# Altium PCB PCB2.PcbDoc
Units mil, origin at the board's own origin, x right, y up, seen from the top; angles counter-clockwise.
Board outline 3900 x 6000 mil, 2 copper layers (Top Layer, Bottom Layer); 94 components, 52 nets, 309 pads, 0 vias.
Unrouted connection lines stored in the file: 197.
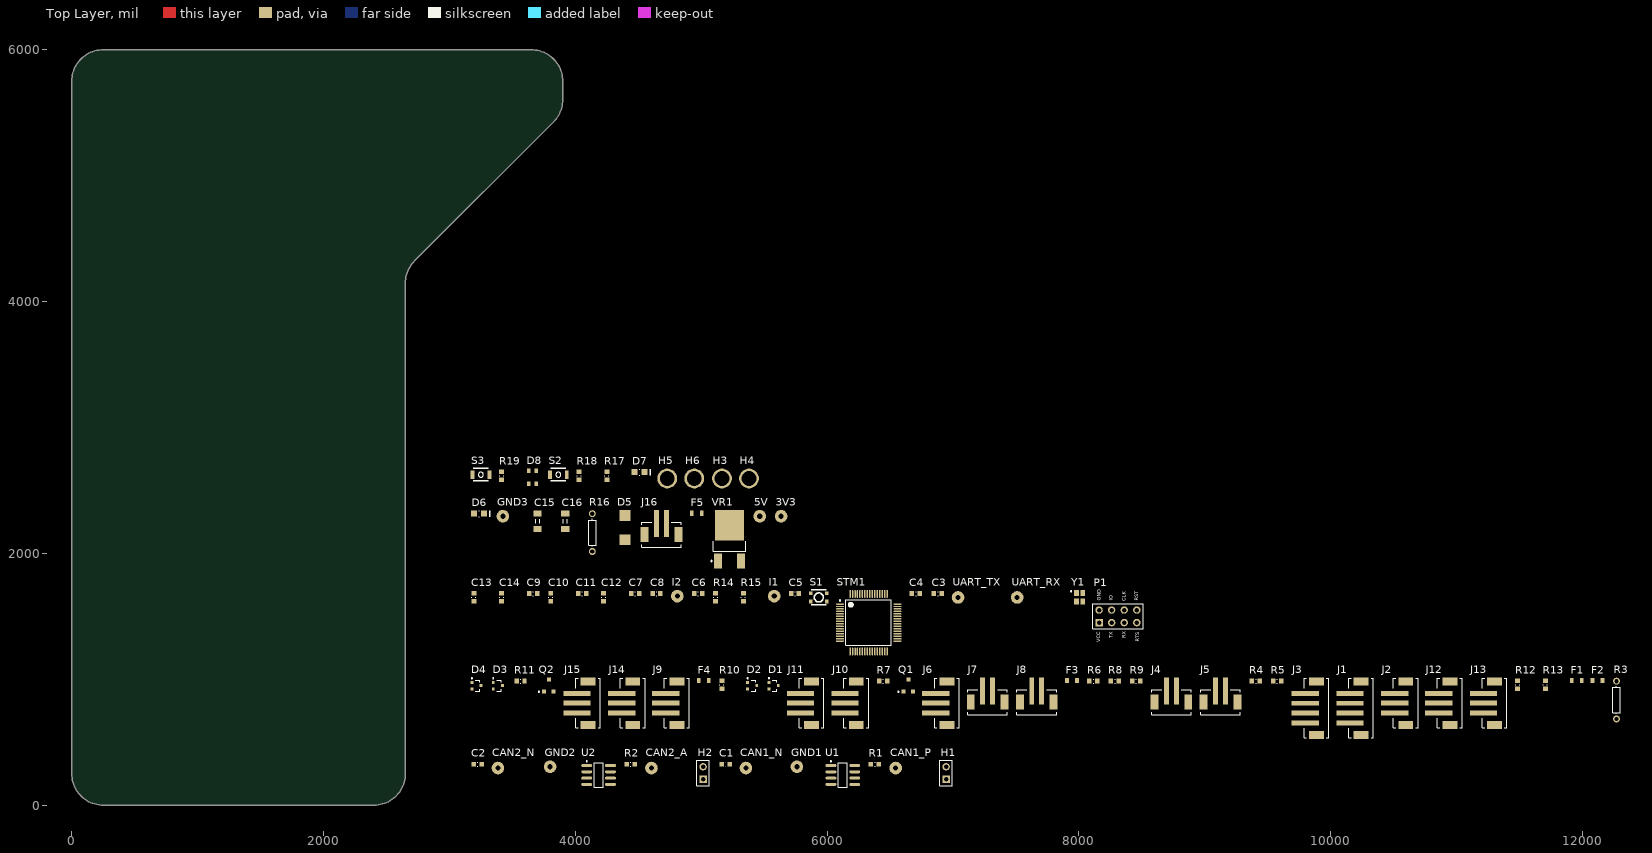
[diagram p0: Top Layer view]
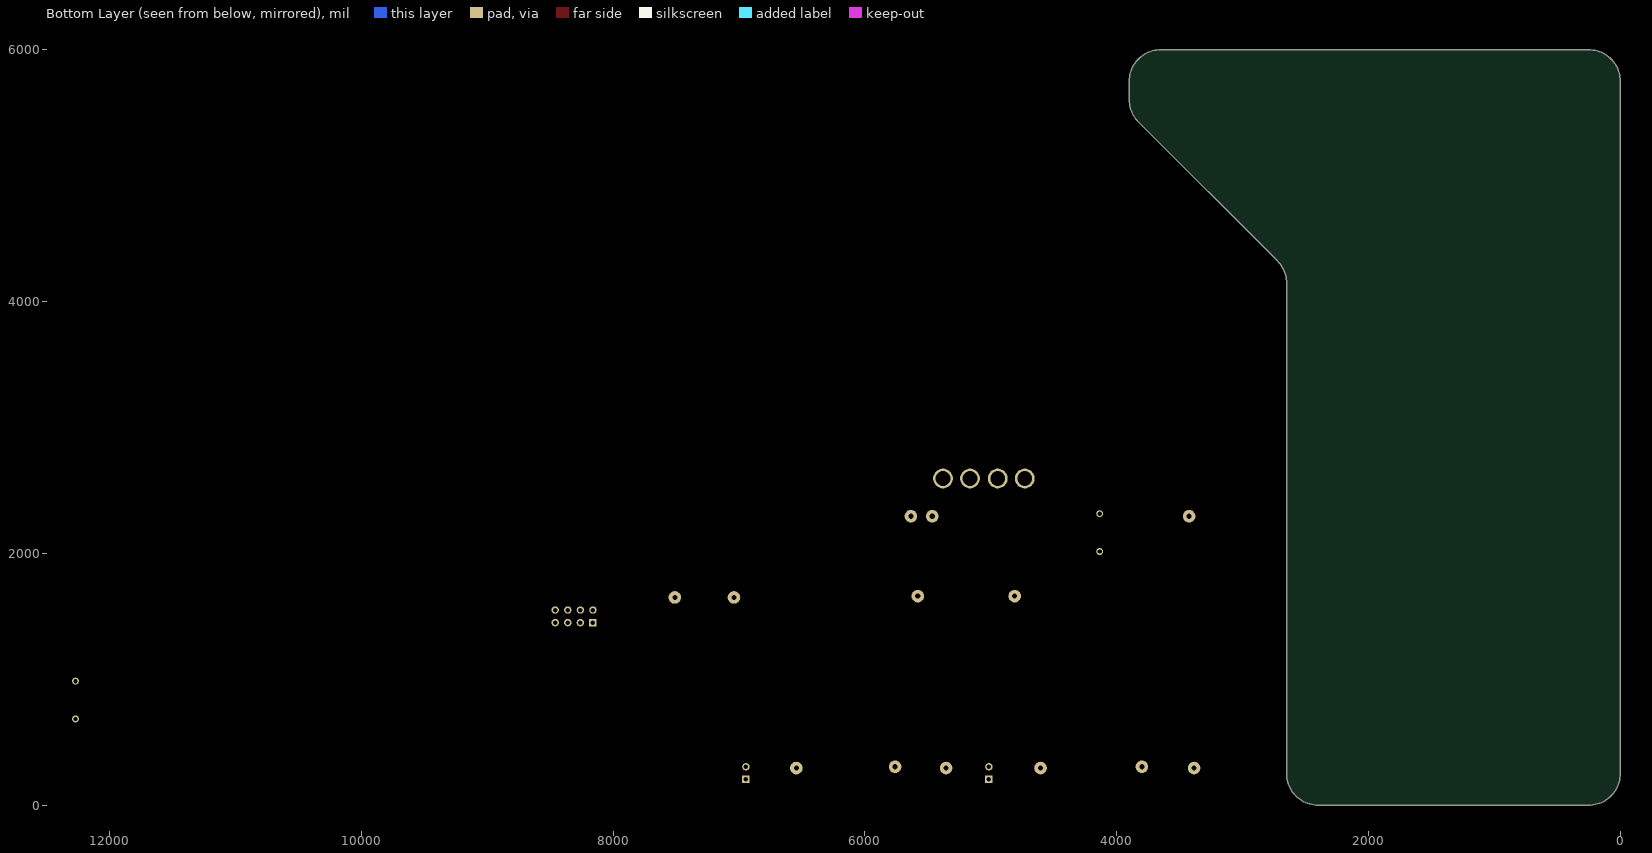
[diagram p1: Bottom Layer view, seen from below]

## Layer stack, top to bottom
Top Solder: solder mask 0.4, Solder Resist, Dk 3.5
Top Layer: signal copper 1.4
Dielectric 1: dielectric 12.6, FR-4, Dk 4.8
Bottom Layer: signal copper 1.4
Bottom Solder: solder mask 0.4, Solder Resist, Dk 3.5

## Board outline
250.25,0.25 cw(c250.25,250.25) 0.25,250.25 0.25,5750.25 cw(c250.25,5750.25) 250.25,6000.25 3650.25,6000.25 cw(c3650.25,5750.25) 3900.25,5750.25 3900.25,5603.8 cw(c3650.25,5603.8) 3827.03,5427.03 2723.47,4323.47 ccw(c2900.25,4146.7) 2650.25,4146.7 2650.25,250.25 cw(c2400.25,250.25) 2400.25,0.25

## Design rules (kind name [scope] priority, off if disabled: settings)
Clearance [All] p1: gap=10 ignorepadtopadclearanceinfootprint=FALSE except(0: Arc-Hole Track-Hole SMDPad-Hole THPad-Hole Via-Hole Fill-Hole Poly-Hole Region-Hole Text-Hole)
DiffPairsRouting [All] p1: maxlimit=10 minlimit=10 mostfreqgap=10 toplayer_minwidth=15 toplayer_maxwidth=15 toplayer_prefwidth=15 bottomlayer_minwidth=15 bottomlayer_maxwidth=15 bottomlayer_prefwidth=15 maxuncoupledlength=500
PolygonConnect [All] p1: connectstyle=Relief reliefconductorwidth=10 reliefentries=4 polygonreliefangle="90 Angle" airgapwidth=10
RoomDefinition Support [InComponentClass('Support')] p1: confinementstyle=ConfineIn formatcopy=TRUE lockcomponents=FALSE outline 3155,2505 5470,2505 5470,2785 3155,2785
RoomDefinition POWER [InComponentClass('POWER')] p2: confinementstyle=ConfineIn formatcopy=TRUE lockcomponents=FALSE outline 3160,1870 5770,1870 5770,2455 3160,2455
RoomDefinition MCU [InComponentClass('MCU')] p3: confinementstyle=ConfineIn formatcopy=TRUE lockcomponents=FALSE outline 3155,1180 8520,1180 8520,1820 3155,1820
RoomDefinition Connectors [InComponentClass('Connectors')] p4: confinementstyle=ConfineIn formatcopy=TRUE lockcomponents=FALSE outline 3155,515 12365,515 12365,1125 3155,1125
RoomDefinition CAN [InComponentClass('CAN')] p5: confinementstyle=ConfineIn formatcopy=TRUE lockcomponents=FALSE outline 3155,120 7005,120 7005,465 3155,465
RoutingVias [All] p1: holewidth=28 width=50 viastyle="Through Hole" minholewidth=28 minwidth=50 maxholewidth=28 maxwidth=50
SolderMaskExpansion [All] p1: expansion=4
Width [All] p1: maxlimit=10 minlimit=10 preferedwidth=10
29 further rules are at their usual default settings.

## Classes and differential pairs
component class Support: D7 D8 H3 H4 H5 H6 R17 R18 R19 S2 S3
component class POWER: 3V3 5V C15 C16 D5 D6 F5 GND3 J16 R16 VR1
component class MCU: C3 C4 C5 C6 C7 C8 C9 C10 C11 C12 C13 C14 I1 I2 P1 R14 R15 S1 STM1 UART_RX UART_TX Y1
component class Connectors: D1 D2 D3 D4 F1 F2 F3 F4 J1 J2 J3 J4 J5 J6 J7 J8 J9 J10 J11 J12 J13 J14 J15 Q1 Q2 R3 R4 R5 R6 R7 R8 R9 R10 R11 R12 R13
component class CAN: C1 C2 CAN1_N CAN1_P CAN2_A CAN2_N GND1 GND2 H1 H2 R1 R2 U1 U2
differential pair CAN2: +CAN2_P -CAN2_N
differential pair CAN1: +CAN1_P -CAN1_N

## Components (designator, comment, footprint, x,y, rotation, side; value= is the part's Value field where it differs from the comment)
3V3 "TESTPOINT_LOOP" TESTPOINT_LOOP 5635,2295 r0 top
5V "TESTPOINT_LOOP" TESTPOINT_LOOP 5465,2295 r0 top
C1 "CAP_0.1uF_16V_0603" CAPC0603(1608)55_N 5195,325 r0 top value=0.1uF
C2 "CAP_0.1uF_16V_0603" CAPC0603(1608)55_N 3225,325 r0 top value=0.1uF
C3 "CAP_15pF_0603" CAPC0603(1608)55_N 6880,1680 r0 top value=15pF
C4 "CAP_15pF_0603" CAPC0603(1608)55_N 6705,1680 r0 top value=15pF
C5 "CAP_0.1uF_16V_0603" CAPC0603(1608)55_N 5745,1680 r0 top value=0.1uF
C6 "CAP_4.7uF_0603" CAPC0603(1608)55_N 4975,1680 r0 top value=4.7uF
C7 "CAP_0.1uF_16V_0603" CAPC0603(1608)55_N 4475,1680 r0 top value=0.1uF
C8 "CAP_1uF_16V_0603" CAPC0603(1608)55_N 4645,1680 r0 top value=1uF
C9 "CAP_0.1uF_16V_0603" CAPC0603(1608)55_N 3665,1680 r0 top value=0.1uF
C10 "CAP_0.1uF_16V_0603" CAPC0603(1608)55_N 3805,1650 r90 top value=0.1uF
C11 "CAP_0.1uF_16V_0603" CAPC0603(1608)55_N 4055,1680 r0 top value=0.1uF
C12 "CAP_4.7uF_0603" CAPC0603(1608)55_N 4225,1650 r90 top value=4.7uF
C13 "CAP_0.1uF_16V_0603" CAPC0603(1608)55_N 3195,1650 r90 top value=0.1uF
C14 "CAP_10nF_0603" CAPC0603(1608)55_N 3415,1650 r90 top value=10nF
C15 "10uF" CAPC1206(3216) 3700,2255 r90 top
C16 "10uF" CAPC1206(3216) 3920,2255 r90 top
CAN1_N "TESTPOINT_LOOP" TESTPOINT_LOOP 5355,295 r90 top
CAN1_P "TESTPOINT_LOOP" TESTPOINT_LOOP 6545,295 r90 top
CAN2_A "TESTPOINT_LOOP" TESTPOINT_LOOP 4605,295 r90 top
CAN2_N "TESTPOINT_LOOP" TESTPOINT_LOOP 3385,295 r90 top
D1 "TVS_DIODE_CAN" NXP-SOT323-3 5575,950 r0 top
D2 "TVS_DIODE_CAN" NXP-SOT323-3 5405,950 r0 top
D3 "TVS_DIODE_CAN" NXP-SOT323-3 3385,950 r0 top
D4 "TVS_DIODE_CAN" NXP-SOT323-3 3215,950 r0 top
D5 "TVS_DIODE_BIDIRECTIONAL" TVS_DIODE_BIDIRECTIONAL 4395,2205 r90 top
D6 "DIO_LED_G" LED_0805_LINE 3235,2315 r0 top
D7 "DIO_LED_Y" LED_0805_LINE 4510,2645 r0 top
D8 "LED_RGB" LED_RGB 3660,2605 r0 top
F1 "FUSE_250mA_0603" FUSE_0603 11955,990 r0 top
F2 "FUSE_250mA_0603" FUSE_0603 12120,990 r0 top
F3 "FUSE_1.5A_0603" FUSE_0603 7945,990 r0 top
F4 "FUSE_1.5A_0603" FUSE_0603 5020,990 r0 top
F5 "FUSE_2A_0603" FUSE_0603 4965,2320 r0 top
GND1 "GND" TESTPOINT_LOOP 5760,305 r90 top
GND2 "TESTPOINT_LOOP" TESTPOINT_LOOP 3800,305 r90 top
GND3 "TESTPOINT_LOOP" TESTPOINT_LOOP 3425,2295 r90 top
H1 "JUMPER_2" HDR1X2 6945,205 r90 top
H2 "JUMPER_2" HDR1X2 5015,205 r90 top
H3 "MOUNTING_HOLES" MOUNTING_HOLE 5165,2595 r0 top
H4 "MOUNTING_HOLES" MOUNTING_HOLE 5380,2595 r0 top
H5 "MOUNTING_HOLES" MOUNTING_HOLE 4730,2595 r0 top
H6 "MOUNTING_HOLES" MOUNTING_HOLE 4945,2595 r0 top
I1 "TESTPOINT_LOOP" TESTPOINT_LOOP 5580,1660 r0 top
I2 "TESTPOINT_LOOP" TESTPOINT_LOOP 4810,1660 r0 top
J1 "CON_4M_SM4" JST-B4B-SM4-TB 10340,770 r90 top
J2 "CON_3M_SM4" JST-B3B-SM4-TB 10695,810 r90 top
J3 "CON_4M_SM4" JST-B4B-SM4-TB 9985,770 r90 top
J4 "CON_2M_SM4" JST-B2B-SM4-TB 8735,720 r0 top
J5 "CON_2M_SM4" JST-B2B-SM4-TB 9125,720 r0 top
J6 "CON_3M_SM4" JST-B3B-SM4-TB 7050,810 r90 top
J7 "CON_2M_SM4" JST-B2B-SM4-TB 7275,720 r0 top
J8 "CON_2M_SM4" JST-B2B-SM4-TB 7665,720 r0 top
J9 "CON_3M_SM4" JST-B3B-SM4-TB 4905,810 r90 top
J10 "CON_3M_SM4" JST-B3B-SM4-TB 6330,810 r90 top
J11 "CON_3M_SM4" JST-B3B-SM4-TB 5975,810 r90 top
J12 "CON_3M_SM4" JST-B3B-SM4-TB 11045,810 r90 top
J13 "CON_3M_SM4" JST-B3B-SM4-TB 11400,810 r90 top
J14 "CON_3M_SM4" JST-B3B-SM4-TB 4555,810 r90 top
J15 "CON_3M_SM4" JST-B3B-SM4-TB 4200,810 r90 top
J16 "CON_2M_SM4" JST-B2B-SM4-TB 4685,2050 r0 top
P1 "HEADER 4X2" HEADER_2X4 8160,1450 r0 top
Q1 "NMOS_20V_6A" NMOS_SOT23-3 6645,950 r0 top
Q2 "NMOS_20V_6A" NMOS_SOT23-3 3790,950 r0 top
R1 "RES_120R_0603" RESC0603(1608)_N 6380,325 r0 top value=120R
R2 "RES_120R_0603" RESC0603(1608)_N 4440,325 r0 top value=120R
R3 "" AXIAL-0.3 12270,835 r90 top value="4.7 K"
R4 "RES_10K_0603" RESC0603(1608)_N 9405,985 r0 top value=10K
R5 "RES_10K_0603" RESC0603(1608)_N 9575,985 r0 top value=10K
R6 "RES_10K_0603" RESC0603(1608)_N 8115,985 r0 top value=10K
R7 "RES_10K_0603" RESC0603(1608)_N 6445,985 r0 top value=10K
R8 "RES_10K_0603" RESC0603(1608)_N 8285,985 r0 top value=10K
R9 "RES_10K_0603" RESC0603(1608)_N 8455,985 r0 top value=10K
R10 "RES_10K_0603" RESC0603(1608)_N 5165,955 r90 top value=10K
R11 "RES_10K_0603" RESC0603(1608)_N 3565,985 r0 top value=10K
R12 "RES_10K_0603" RESC0603(1608)_N 11485,955 r90 top value=10K
R13 "RES_10K_0603" RESC0603(1608)_N 11705,955 r90 top value=10K
R14 "RES_4K7_0603" RESC0603(1608)_N 5115,1650 r90 top value=4K7
R15 "RES_4K7_0603" RESC0603(1608)_N 5335,1650 r90 top value=4K7
R16 "Res1" AXIAL-0.3 4135,2165 r90 top value=100R
R17 "RES_100R_0603" RESC0603(1608)_N 4250,2615 r90 top value=100R
R18 "RES_10K_0603" RESC0603(1608)_N 4030,2615 r90 top value=10K
R19 "RES_10K_0603" RESC0603(1608)_N 3415,2615 r90 top value=10K
S1 "SW_PWR" PTS830GM140 5935,1650 r0 top
S2 "SW_TACTILE" B3U-1100P 3865,2625 r0 top
S3 "SW_TACTILE" B3U-1100P 3250,2625 r0 top
STM1 "STM32F446RET6" STM-LQFP64_L 6330,1450 r0 top
U1 "IC TXRX CAN" LT-S8_N 6125,240 r0 top
U2 "IC TXRX CAN" LT-S8_N 4185,240 r0 top
UART_RX "TESTPOINT_LOOP" TESTPOINT_LOOP 7510,1650 r90 top
UART_TX "TESTPOINT_LOOP" TESTPOINT_LOOP 7040,1650 r90 top
VR1 "5V0_3V3_LDO" VOLTAGE_REGULATOR 5225,2050 r0 top
Y1 "CRYSTAL_32MHZ" AVX-CX2520DB32000D0GEJZ1-4_V 8005,1650 r0 top

## Footprints (in the part's own frame and the unit in brackets; to place one, negate y for a bottom-side part, rotate by r counter-clockwise, add the part's x,y. Pads: shape width x height; smd on the part's side, far side on the other; paste and mask are expansions set on the pad)
AVX-CX2520DB32000D0GEJZ1-4_V [mm] "Hand Drawn, 4-Leads,Body 2.5x2mm"
  rect 1x1.2 smd: 1(-0.65,0.85) 2(-0.65,-0.85) 3(0.65,-0.85) 4(0.65,0.85)
  silkscreen extent -1.82,1.13 -1.58,1.38, body extent -1,-1.25 1,1.25, height 0.55
AXIAL-0.3 [mm] "Axial Device, Thru-Hole; 2 Leads; 0.3 in Pin Spacing"
  round 1.4 hole 0.85: 1(-3.81,0) 2(3.81,0)
  silkscreen extent -2.77,-0.76 2.77,0.76
B3U-1100P [mm] "TACTILE SWITCH GREY"
  rect 0.8x1.7 smd: 1(-1.7,0) 2(1.7,0)
  silkscreen extent -1.5,-1.25 1.5,1.25, body extent -2,-1.25 2,1.25, height 1.6
CAPC0603(1608)55_N [mm] "Chip Capacitor, Body 1.6x0.8mm, Height 0.55mm, IPC Medium Density"
  rect 0.9x1 smd: 1(-0.8,0) 2(0.8,0)
  silkscreen extent -0.05,-0.4 0.05,0.4, body extent -0.87,-0.48 0.88,0.47, height 0.55
CAPC1206(3216) [mm] "Chip Capacitor, Body 3.2x1.6mm, Height 0.55mm, IPC Medium Density"
  rect 1.2x1.7 smd: 1(-1.6,0) 2(1.6,0)
  silkscreen extent -0.45,-0.4 0.45,0.4, body extent -1.6,-0.85 1.6,0.85, height 1.75
FUSE_0603 [mm] "Chip Fuse, Body 1.6x0.81mm"
  rect 0.762x1.09 smd: 1(-1.005,0) 2(1.005,0)
  body extent -0.8,-0.38 0.8,0.38, height 0.75
HDR1X2 [mm] "Connector; Header; 2 Position"
  rect 1.5x1.5 hole 0.9: 1(0,0)
  round 1.5 hole 0.9: 2(2.54,0)
  silkscreen extent -1.27,-1.27 3.81,1.27, body extent -1.27,-1.27 3.81,1.27, height 6.35
HEADER_2X4 [mm]
  rect 1.5x1.5 hole 0.9: 1(0,0)
  round 1.5 hole 0.9: 2(2.54,0) 3(5.08,0) 4(7.62,0) 5(0,2.54) 6(2.54,2.54) 7(5.08,2.54) 8(7.62,2.54)
  silkscreen extent -1.27,-1.27 8.89,3.81, body extent -1.36,-1.32 8.8,3.67, height 8.54
JST-B2B-SM4-TB [mm]
  rect 1x5.5 smd: 1(-1,4.75) 2(1,4.75)
  rect 1.6x3 smd: 3(-3.4,2.5) 4(3.4,2.5)
  silkscreen extent -4,0 4,5, body extent -3.97,0 3.97,7, height 6.6
JST-B3B-SM4-TB [mm]
  rect 1x5.5 smd: 1(-2,4.75) 2(0,4.75) 3(2,4.75)
  rect 1.6x3 smd: 4(-4.4,2.5) 5(4.4,2.5)
  silkscreen extent -5,0 5,5, body extent -4.97,0 4.97,7, height 6.6
JST-B4B-SM4-TB [mm]
  rect 1x5.5 smd: 1(-3,4.75) 2(-1,4.75) 3(1,4.75) 4(3,4.75)
  rect 1.6x3 smd: 5(-5.4,2.5) 6(5.4,2.5)
  silkscreen extent -6,0 6,5, body extent -5.98,0 5.98,7, height 6.6
LED_0805_LINE [mm] "SMD, 2-Leads, Body 2x1.25mm"
  rect 1.2x1.2 smd: 1(-1.05,0) 2(1.05,0)
  silkscreen extent -0.05,-0.64 2.16,0.64, body extent -1,-0.63 1,0.63, height 0.8
LED_RGB [mm]
  rect 0.7x0.86 smd: 1(-0.737,-1.325) 2(0.738,-1.325) 3(-0.737,1.325) 4(0.738,1.325)
  body extent -1.4,-1.75 1.4,1.75, height 1.89
LT-S8_N [mm] "SOP, 8-Leads, Body 4.9x3.9mm, Pitch 1.27mm, IPC Medium Density"
  oval 2.2x0.6 smd: 1(-2.4,1.905) 2(-2.4,0.635) 3(-2.4,-0.635) 4(-2.4,-1.905) 5(2.4,-1.905) 6(2.4,-0.635) 7(2.4,0.635) 8(2.4,1.905)
  silkscreen extent -2.52,-2.5 0.9,2.88, body extent -2,-2.5 2,2.5, height 1.76
MOUNTING_HOLE [mm]
  round 4 hole 3 unplated: 0(0,0)
NMOS_SOT23-3 [mm] "SOT23, 3 pins, Body 2.90mm x 2.80mm"
  rect 0.8x0.8 smd: 1(-0.95,-1.2) 2(0.95,-1.2) 3(0,1.2)
  silkscreen extent -2.12,-1.37 -1.88,-1.13, body extent -1.46,-1.25 1.46,1.23, height 1
NXP-SOT323-3 [mm] "SOT23, 3-Leads, Body 2.2x1.35mm, Pitch 0.65mm"
  rect 0.55x0.6 smd paste-1: 1(-0.925,0.65) 2(-0.925,-0.65) 3(0.925,0)
  silkscreen extent -1.05,-1.1 0.67,1.62, body extent -1.15,-1.1 1.15,1.1, height 1.1
PTS830GM140 [mm] "PWR TACTILE SWITCH (RED)"
  rect 0.7x0.75 smd: 1(-1.625,0.825) 2(1.625,0.825) 3(-1.625,-0.825) 4(1.625,-0.825)
  silkscreen extent -1.53,-1.5 1.53,1.5, body extent -1.75,-1.3 1.75,1.3, height 1.35
RESC0603(1608)_N [mm] "Chip Resistor, Body 1.6x0.8mm, IPC Medium Density"
  rect 0.9x1 smd: 1(-0.8,0) 2(0.8,0)
  silkscreen extent -0.05,-0.4 0.05,0.4, body extent -0.85,-0.47 0.85,0.47, height 0.6
STM-LQFP64_L [mm] "QFP, 64-Leads, Body 10x10mm, Pitch 0.5mm, IPC High Density"
  oval 1.6x0.3 smd: 1(-5.8,3.75) 2(-5.8,3.25) 3(-5.8,2.75) 4(-5.8,2.25) 5(-5.8,1.75) 6(-5.8,1.25) 7(-5.8,0.75) 8(-5.8,0.25) 9(-5.8,-0.25) 10(-5.8,-0.75) 11(-5.8,-1.25) 12(-5.8,-1.75) 13(-5.8,-2.25) 14(-5.8,-2.75) 15(-5.8,-3.25) 16(-5.8,-3.75) 33(5.8,-3.75) 34(5.8,-3.25) 35(5.8,-2.75) 36(5.8,-2.25) 37(5.8,-1.75) 38(5.8,-1.25) 39(5.8,-0.75) 40(5.8,-0.25) 41(5.8,0.25) 42(5.8,0.75) 43(5.8,1.25) 44(5.8,1.75) 45(5.8,2.25) 46(5.8,2.75) 47(5.8,3.25) 48(5.8,3.75)
  oval 0.3x1.6 smd: 17(-3.75,-5.8) 18(-3.25,-5.8) 19(-2.75,-5.8) 20(-2.25,-5.8) 21(-1.75,-5.8) 22(-1.25,-5.8) 23(-0.75,-5.8) 24(-0.25,-5.8) 25(0.25,-5.8) 26(0.75,-5.8) 27(1.25,-5.8) 28(1.75,-5.8) 29(2.25,-5.8) 30(2.75,-5.8) 31(3.25,-5.8) 32(3.75,-5.8) 49(3.75,5.8) 50(3.25,5.8) 51(2.75,5.8) 52(2.25,5.8) 53(1.75,5.8) 54(1.25,5.8) 55(0.75,5.8) 56(0.25,5.8) 57(-0.25,5.8) 58(-0.75,5.8) 59(-1.25,5.8) 60(-1.75,5.8) 61(-2.25,5.8) 62(-2.75,5.8) 63(-3.25,5.8) 64(-3.75,5.8)
  silkscreen extent -5.92,-4.6 4.6,4.6, body extent -5,-5 5,5, height 1.6
TESTPOINT_LOOP [mm]
  round 2.54 hole 1.02: 1(0,0)
  body extent -1.27,-1.27 1.27,1.27, height 4.57
TVS_DIODE_BIDIRECTIONAL [mm]
  rect 2.16x2.26 smd: 1(-2.45,0) 2(2.45,0)
  body extent -2.7,-1.8 2.7,1.8, height 2.27
VOLTAGE_REGULATOR [mm] "DPAK, 3-Leads, Body 6.095x6.54mm, Pitch 4.57mm"
  rect 1.6x3 smd: 1(-2.285,-2.79) 3(2.285,-2.79)
  rect 5.8x6.2 smd: 2(0,4.39)
  silkscreen extent -3.76,-2.91 3.27,1.14, body extent -3.27,-0.84 3.27,5.25, height 2.38

## Part data
3V3 5V CAN1_N CAN1_P CAN2_A CAN2_N GND2 GND3 I1 I2 UART_RX UART_TX: "Loop testpoint through-hole pad", Manufacturer="Keystone Electronics", Manufacturer Part Number 1=5002, Supplier Part Number 1=36-5002-ND, Supplier 1=Digi-Key
C1 C2 C5 C7 C9 C10 C11 C13: "CAP CER 0.1UF 16V X7R 0603", Manufacturer=Yageo, MPN=CC0603KRX7R7BB104, Package="0603 (1608 Metric)", Supplier Part Number 1=311-1088-1-ND, Temperature Coefficient=X7R, Voltage Rating=16V, Dimensions="0.063\" L x 0.031\" W (1.60mm x 0.80mm)", Supplier 1=Digi-Key
C3 C4: "CAP CER 15PF 250V NPO 0603", Manufacturer=Yageo, MPN=AC0603JRNPOYBN150, Package="0603 (1608 Metric)", Supplier Part Number 1=311-3282-1-ND, Temperature Coefficient=NP0, Voltage Rating=250V, Dimensions="0.063\" L x 0.031\" W (1.60mm x 0.80mm)", Supplier 1=Digi-Key
C6 C12: "CAP CER 4.7UF 6.3V X5R 0603", Manufacturer=Yageo, MPN=CC0603KRX5R5BB475, Package="0603 (1608 Metric)", Supplier Part Number 1=311-1521-1-ND, Temperature Coefficient=X5R, Voltage Rating=6.3V, Dimensions="0.063\" L x 0.031\" W (1.60mm x 0.80mm)", Supplier 1=Digi-Key
C8: "CAP CER 1UF 16V Y5V 0603", Manufacturer=Yageo, MPN=CC0603ZRY5V7BB105, Package="0603 (1608 Metric)", Supplier Part Number 1=311-1372-1-ND, Temperature Coefficient=Y5V, Voltage Rating=16V, Dimensions="0.063\" L x 0.031\" W (1.60mm x 0.80mm)", Supplier 1=Digi-Key
C14: "CAP CER 10000PF 16V X7R 0603", Manufacturer=Yageo, MPN=CC0603KRX7R7BB103, Package="0603 (1608 Metric)", Supplier Part Number 1=311-3369-1-ND, Temperature Coefficient=X7R, Voltage Rating=16V, Dimensions="0.063\" L x 0.031\" W (1.60mm x 0.80mm)", Supplier 1=Digi-Key
C15 C16: library part CAP_10uF_50V_1206, "CAP CER 10UF 50V X5R 1206", Manufacturer=Murata, MPN=GRT31CR61H106KE01L, Package="1206 (3216 Metric)", Supplier Part Number 1=490-12456-1-ND, Voltage Rating=50V, Dimensions="0.126\" L x 0.063\" W (3.20mm x 1.6mm)", Supplier 1=Digi-Key
D1 D2 D3 D4: "TVS DIODE 24V 41V SOT323-3", Manufacturer="Nexperia USA Inc.", Manufacturer Part Number=PESD2CAN,215, Package="SC-70, SOT-323", Supplier Part Number 1=1727-3891-1-ND, ComponentLink1Description=Datasheet, ComponentLink1URL=https://assets.nexperia.com/documents/data-sheet/PESD1CAN-U.pdf, Supplier 1=Digi-Key
D5: "TVS DIODE 5V 9.2V DO214AA", Breakdown Voltage=6.4V, Case/Package=SMB, Clamping Voltage=9.2V, Leakage Current=1.6mA, Manufacturer="Nexperia USA Inc.", Manufacturer 1=Littelfuse, Manufacturer Part Number 1=SMBJ5.0CA, Max Breakdown Voltage=7V, Max Operating Temperature=150°C, Max Power Dissipation=5W, Max Surge Current=65.3A, Min Operating Temperature=-65°C, MPN=PESD2CAN,215, Operating Supply Voltage=5V, Package="SC-70, SOT-323", Package Quantity=3000, Peak Pulse Power=600W, Power Line Protection=No, Supplier Part Number 1=1727-3891-1-ND, Test Current=10mA, ComponentLink1Description=Datasheet, ComponentLink1URL=https://www.littelfuse.com/~/media/electronics/datasheets/tvs_diodes/littelfuse_tvs_diode_smbj_datasheet.pdf.pdf, Composition=Zener, Direction=Bidirectional, Element Configuration=Single, ESD Protection=Yes, Height=0.096inch, Lead Free="Lead Free", Length=0.179inch, Max Reverse Leakage Current=1.6mA, Min Breakdown Voltage=6.4V, Mount="Surface Mount", Number of Bidirectional Channels=1, Number of Channels=1, Number of Elements=1, Number of Pins=2, Packaging="Tape and Reel", Peak Pulse Current=65.3A, Polarity=Bidirectional, Power Dissipation=600W, Pricing 1="1=0.39000, 10=0.31300, 25=0.28640, 100=0.17980, 250=0.17784, 500=0.16650, 1000=0.11322 (USD)", Radiation Hardening=No, REACH SVHC="No SVHC", Reverse Breakdown Voltage=6.4V, Reverse Standoff Voltage=5V, Stock 1=23233, Supplier 1=Digi-Key, Termination=SMD/SMT, Voltage Rating (DC)=5V, Width=0.155inch
D6: "LED GREEN DIFFUSED 0805 SMD", Forward Voltage Drop=2.2V, Manufacturer=OSRAM, MPN="LG R971-KN-1", Package="0805 (2012 Metric)", Supplier Part Number 1=475-1410-1-ND, Supplier 1=Digi-Key
D7: "LED YELLOW DIFFUSED 0805 SMD", Forward Voltage Drop=2.2V, Manufacturer=OSRAM, MPN="LY R976-PS-36", Package="0805 (2012 Metric)", Supplier Part Number 1=475-2560-1-ND, Supplier 1=Digi-Key
D8: "LED RGB DIFFUSED 4PLCC SMD", Case/Package=PLCC, Color=Blue,Green,Red, Forward Voltage=3.1V, Lens Color=White, Manufacturer 1=Broadcom, Manufacturer Part Number 1=ASMB-MTB1-0A3A2, Supplier Part Number 1=516-3280-1-ND, Test Current=20mA, ComponentLink1Description=http://www.farnell.com/datasheets/2111106.pdf?src-supplier=Farnell, ComponentLink1URL=http://www.farnell.com/datasheets/2111106.pdf?src-supplier=Farnell, ComponentLink2Description=https://docs.broadcom.com/docs/AV02-4194EN?src-supplier=Digi-Key, ComponentLink2URL=https://docs.broadcom.com/docs/AV02-4194EN?src-supplier=Digi-Key, ComponentLink3Description=http://www.farnell.com/datasheets/1801564.pdf?src-supplier=Element14, ComponentLink3URL=http://www.farnell.com/datasheets/1801564.pdf?src-supplier=Element14, ComponentLink4Description=http://www.farnell.com/datasheets/2111106.pdf?src-supplier=Newark, ComponentLink4URL=http://www.farnell.com/datasheets/2111106.pdf?src-supplier=Newark, Dominant Wavelength=470nm, Height=1.9mm, Length=3.2mm, Lens Style=Round, Lens Transparency=Diffused, Luminous Intensity=350mcd, Mount="Surface Mount", Number of Pins=4, Packaging="Cut Tape", Pricing 1="1=0.60000, 10=0.47100, 100=0.30210, 500=0.25980, 1000=0.20059 (USD)", REACH SVHC="No SVHC", RoHS=Yes, Stock 1=142531, Supplier 1=Digi-Key, Viewing Angle=115°, Width=2.8mm
F1 F2: "FUSE SMD 250mA 32V", Current Rating=250mA, Supplier Part Number 1=F6020CT-ND, Voltage Rating (AC)=32V, ComponentLink1Description=https://datasheet.ciiva.com/303/467-303396.pdf?src-supplier=Digi-Key, ComponentLink1URL=https://datasheet.ciiva.com/303/467-303396.pdf?src-supplier=Digi-Key, ComponentLink2Description=https://datasheet.ciiva.com/18652/littelfuse-fuse-467-datasheet-pdf-18652490.pdf?src-supplier=Digi-Key, ComponentLink2URL=https://datasheet.ciiva.com/18652/littelfuse-fuse-467-datasheet-pdf-18652490.pdf?src-supplier=Digi-Key, ComponentLink3Description=https://datasheet.ciiva.com/18652/littelfuse-fuse-467-datasheet-pdf-18652491.pdf?src-supplier=Digi-Key, ComponentLink3URL=https://datasheet.ciiva.com/18652/littelfuse-fuse-467-datasheet-pdf-18652491.pdf?src-supplier=Digi-Key, ComponentLink4Description=https://datasheet.ciiva.com/18652/littelfuse-fuse-467-datasheet-pdf-18652492.pdf?src-supplier=Digi-Key, ComponentLink4URL=https://datasheet.ciiva.com/18652/littelfuse-fuse-467-datasheet-pdf-18652492.pdf?src-supplier=Digi-Key, Mount="Surface Mount", Supplier 1=Digi-Key, Supplier Packaging 1="Cut Tape", Voltage Rating (DC)=32V
F3 F4: "FUSE SMD 1.5A 32V", Current Rating=1.5A, Supplier Part Number 1=F5702CT-ND, Voltage Rating (AC)=32V, ComponentLink1Description=https://datasheet.ciiva.com/26890/getdatasheetpartid-721713-26890390.pdf?src-supplier=Verical, ComponentLink1URL=https://datasheet.ciiva.com/26890/getdatasheetpartid-721713-26890390.pdf?src-supplier=Verical, ComponentLink2Description=https://datasheet.ciiva.com/7464/467-7464069.pdf?src-supplier=Digi-Key, ComponentLink2URL=https://datasheet.ciiva.com/7464/467-7464069.pdf?src-supplier=Digi-Key, ComponentLink3Description=https://datasheet.ciiva.com/7464/467-7464072.pdf?src-supplier=Digi-Key, ComponentLink3URL=https://datasheet.ciiva.com/7464/467-7464072.pdf?src-supplier=Digi-Key, Mount="Surface Mount", Supplier 1=Digi-Key, Supplier Packaging 1="Cut Tape", Voltage Rating (DC)=32V
F5: "FUSE SMD 2A 32V", Current Rating=2A, Supplier Part Number 1=F7132CT-ND, Voltage Rating (AC)=32V, ComponentLink1Description=https://datasheet.ciiva.com/303/467-303400.pdf?src-supplier=Digi-Key, ComponentLink1URL=https://datasheet.ciiva.com/303/467-303400.pdf?src-supplier=Digi-Key, ComponentLink2Description=http://datasheet.octopart.com/0467002.NRHF-Littelfuse-datasheet-32023482.pdf?src-supplier=Future+Electronics, ComponentLink2URL=http://datasheet.octopart.com/0467002.NRHF-Littelfuse-datasheet-32023482.pdf?src-supplier=Future+Electronics, ComponentLink3Description=http://datasheet.octopart.com/0467002.NRHF-Littelfuse-datasheet-136509808.pdf?src-supplier=Future+Electronics, ComponentLink3URL=http://datasheet.octopart.com/0467002.NRHF-Littelfuse-datasheet-136509808.pdf?src-supplier=Future+Electronics, Mount="Surface Mount", Supplier 1=Digi-Key, Supplier Packaging 1="Cut Tape", Voltage Rating (DC)=32V
GND1: library part TESTPOINT_LOOP, "Loop testpoint through-hole pad", Manufacturer="Keystone Electronics", Manufacturer Part Number 1=5002, Supplier Part Number 1=36-5002-ND, Supplier 1=Digi-Key
H1 H2: "HEADER 2X1"
H3 H4 H5 H6: "6cm x 6cm"
J1 J3: Manufacturer=JST, Manufacturer Part Number=B4B-PH-SM4-TB(LF)(SN), Max Current Rating=2A, Max Voltage Rating=100V, Supplier Part Number 1=455-1736-1-ND, ComponentLink1Description=https://datasheet.ciiva.com/8052/1699381-8052048.pdf?src-supplier=Element14, ComponentLink1URL=https://datasheet.ciiva.com/8052/1699381-8052048.pdf?src-supplier=Element14, ComponentLink2Description=https://datasheet.ciiva.com/11747/0900766b80ddea81-11747504.pdf?src-supplier=RSComponents, ComponentLink2URL=https://datasheet.ciiva.com/11747/0900766b80ddea81-11747504.pdf?src-supplier=RSComponents, ComponentLink3Description=https://datasheet.ciiva.com/6747/80567-6747409.pdf?src-supplier=Newark, ComponentLink3URL=https://datasheet.ciiva.com/6747/80567-6747409.pdf?src-supplier=Newark, ComponentLink4Description=https://datasheet.ciiva.com/727/eph-727525.pdf?src-supplier=Digi-Key, ComponentLink4URL=https://datasheet.ciiva.com/727/eph-727525.pdf?src-supplier=Digi-Key, ComponentLink5Description=https://datasheet.ciiva.com/712/eph-712582.pdf?src-supplier=Digi-Key, ComponentLink5URL=https://datasheet.ciiva.com/712/eph-712582.pdf?src-supplier=Digi-Key, ComponentLink6Description=https://datasheet.ciiva.com/712/eph-712583.pdf?src-supplier=Digi-Key, ComponentLink6URL=https://datasheet.ciiva.com/712/eph-712583.pdf?src-supplier=Digi-Key, Pitch=2mm, Supplier 1=Digi-Key
J2 J6 J9 J10 J11 J12 J13 J14 J15: Manufacturer=JST, Manufacturer Part Number=B3B-PH-SM4-TB(LF)(SN), Max Current Rating=2A, Max Voltage Rating=100V, Supplier Part Number 1=455-1735-1-ND, ComponentLink1Description=https://datasheet.ciiva.com/11747/0900766b80ddea81-11747684.pdf?src-supplier=RSComponents, ComponentLink1URL=https://datasheet.ciiva.com/11747/0900766b80ddea81-11747684.pdf?src-supplier=RSComponents, Pitch=2mm, Supplier 1=Digi-Key
J4 J5 J7 J8 J16: Manufacturer=JST, Manufacturer Part Number=B2B-PH-SM4-TB(LF)(SN), Max Current Rating=2A, Max Voltage Rating=100V, Supplier Part Number 1=455-1734-1-ND, ComponentLink1Description=https://datasheet.ciiva.com/11748/0900766b80ddea81-11748001.pdf?src-supplier=RSComponents, ComponentLink1URL=https://datasheet.ciiva.com/11748/0900766b80ddea81-11748001.pdf?src-supplier=RSComponents, ComponentLink2Description=https://datasheet.ciiva.com/16216/b2b-ph-sm4-tblfsn-16216102.pdf?src-supplier=Future+Electronics, ComponentLink2URL=https://datasheet.ciiva.com/16216/b2b-ph-sm4-tblfsn-16216102.pdf?src-supplier=Future+Electronics, ComponentLink3Description=https://datasheet.ciiva.com/8052/80567-8052023.pdf?src-supplier=Element14, ComponentLink3URL=https://datasheet.ciiva.com/8052/80567-8052023.pdf?src-supplier=Element14, ComponentLink4Description=https://datasheet.ciiva.com/712/eph-712504.pdf?src-supplier=Digi-Key, ComponentLink4URL=https://datasheet.ciiva.com/712/eph-712504.pdf?src-supplier=Digi-Key, ComponentLink5Description=https://datasheet.ciiva.com/712/eph-712505.pdf?src-supplier=Digi-Key, ComponentLink5URL=https://datasheet.ciiva.com/712/eph-712505.pdf?src-supplier=Digi-Key, ComponentLink6Description=https://datasheet.ciiva.com/712/eph-712506.pdf?src-supplier=Digi-Key, ComponentLink6URL=https://datasheet.ciiva.com/712/eph-712506.pdf?src-supplier=Digi-Key, Pitch=2mm, Supplier 1=Digi-Key
P1: "Header, 4-Pin Dual row", Manufacturer="Sullins Connector Solutions", MPN=GRPB042VWVN-RC, Supplier Part Number 1=S9015E-04-ND, Supplier 1=Digi-Key
Q1 Q2: "MOSFET N-CH 20V 6A SOT23", Manufacturer="Alpha & Omega", MPN=AO3420, Package="TO-236-3, SC-59, SOT-23-3", Supplier Part Number 1=785-1014-1-ND, ComponentLink1Description=Datasheet, ComponentLink1URL=http://aosmd.com/res/data_sheets/AO3420.pdf, Supplier 1=Digi-Key
R1 R2: "RES SMD 120 OHM 5% 1/10W 0603", Manufacturer=Yageo, MPN=RC0603JR-07120RL, Package="0603 (1608 Metric)", Supplier Part Number 1=311-120GRCT-ND, Tolerance=5%, Dimensions="0.063\" L x 0.031\" W (1.60mm x 0.80mm)", Supplier 1=Digi-Key
R3: library part Res1, "Resistor", LatestRevisionDate=17-Jul-2002, LatestRevisionNote="Re-released for DXP Platform.", PackageDescription="Axial Device, Thru-Hole; 2 Leads; 0.3 in Pin Spacing", PackageReference=AXIAL-0.3, Published=8-Jun-2000, Publisher="Altium Limited"
R4 R5 R6 R7 R8 R9 R10 R11 R12 R13 R18 R19: "RES SMD 10K OHM 5% 1/10W 0603", Manufacturer=Yageo, MPN=RC0603JR-0710KL, Package="0603 (1608 Metric)", Supplier Part Number 1=311-10KGRCT-ND, Tolerance=5%, Dimensions="0.063\" L x 0.031\" W (1.60mm x 0.80mm)", Supplier 1=Digi-Key
R14 R15: "RES SMD 4.7K OHM 5% 1/10W 0603", Manufacturer=Yageo, MPN=RC0603JR-074K7L, Package="0603 (1608 Metric)", Supplier Part Number 1=311-4.7KGRCT-ND, Tolerance=5%, Dimensions="0.063\" L x 0.031\" W (1.60mm x 0.80mm)", Supplier 1=Digi-Key
R16: "Resistor", LatestRevisionDate=17-Jul-2002, LatestRevisionNote="Re-released for DXP Platform.", PackageDescription="Axial Device, Thru-Hole; 2 Leads; 0.3 in Pin Spacing", PackageReference=AXIAL-0.3, Published=8-Jun-2000, Publisher="Altium Limited"
R17: "RES SMD 100 OHM 1% 1/10W 0603", Manufacturer=Yageo, MPN=RC0603FR-07100RL, Package="0603 (1608 Metric)", Supplier Part Number 1=311-100HRCT-ND, Tolerance=1%, Dimensions="0.063\" L x 0.031\" W (1.60mm x 0.80mm)", Supplier 1=Digi-Key
S1: "Power Switch (Red)", Manufacturer=C&K, MPN="PTS830GM140 SMTR LFS", Supplier Part Number 1=CKN10587CT-ND, ComponentLink1Description=Datasheet, ComponentLink1URL=https://www.ckswitches.com/media/1478/pts830.pdf, Supplier 1=Digi-Key
S2 S3: "Tactile Switch (Grey)", Manufacturer="Omron Electronics Inc-EMC Div", MPN=B3U-1100P, Supplier Part Number 1=SW1021TR-ND, Supplier 1=Digi-Key
STM1: library part MCU_STM32F446RET6, "ARM Cortex-M4 32-bit MCU+FPU, 512 KB Flash, 128 KB Internal RAM, 50 I/Os, 64-Pin LQFP, -40 to 85 degC, Tray", I/Os (High Current)=50, Operating Frequency(F) (Processor speed) (MHz)=180, Package Description=LQFP64, Package Reference="64-Pin Low-profile Quad Flat Package, Body 10 x 10 mm, Pitch 0.5 mm", Supply Voltage(Vcc) min (V)=1.7, ComponentLink1Description="Manufacturer URL", ComponentLink1URL=http://www.st.com/, ComponentLink2Description=Datasheet, ComponentLink2URL=http://www.st.com/st-web-ui/static/active/en/resource/technical/document/datasheet/DM00141306.pdf, Core="ARM Cortex-M4", D/A Converter=2, DatasheetVersion="Rev. 6", FLASH Size (Prog) (kB)=512, Internal RAM Size (kB)=128, Mounting Technology="Surface Mount", Packing=Tray
U1 U2: library part LTC2875, "IC TXRX CAN 4MBPS 8SO", Manufacturer="Linear Technologies", MPN=LTC2875IS8#PBF, Package="8-SOIC (0.154\", 3.90mm Width)", Supplier Part Number 1=LTC2875IS8#PBF-ND, ComponentLink1Description=Datasheet, ComponentLink1URL=https://www.analog.com/media/en/technical-documentation/data-sheets/2875f.pdf, Supplier 1=Digi-Key
VR1: "IC REG LINEAR 3.3V 1A DPAK", Current Output=1A, Manufacturer="ON Semiconductor", MPN=NCP1117DT33T5G, Supplier Part Number 1=NCP1117DT33T5GOSCT-ND, Supplier 1=Digi-Key
Y1: "CRYSTAL 32MHZ 8PF SMD", Manufacturer="Kyocera International Inc. Electronic Components", MPN=CX2520DB32000D0GPSC1, Package="4-SMD, No Lead", Supplier Part Number 1=1253-1730-1-ND, ComponentLink1Description=Datasheet, ComponentLink1URL=https://media.digikey.com/pdf/Data%20Sheets/AVX%20PDFs/CX2520DB_USY1M-H1-16428-00_Spec.pdf, Dimensions="0.098\" L x 0.079\" W (2.50mm x 2.00mm)", Supplier 1=Digi-Key

## Nets (pads, with @x,y where several pads share a name; then routed paths per layer and width w, separated by ;. In a path a pad name is that pad's centre, name@x,y a point inside that pad or via, vN(x,y) a via of type N, cw(c..) or ccw(c..) an arc to the next point about the centre after c; other vN are vias at no path point)
+3V3: 3V3.1 C1.2 C2.2 C7.2 C8.2 C9.2 C10.2 C11.2 C12.2 C13.2 C14.2 C16.1 D8.4 F1.1 F2.1 J3.1 P1.1 Q1.1 Q2.1 R3.2 R4.2 R5.2 R7.2 R8.2 R9.2 R11.2 R14.2 R15.2 R16.2 R18.1 R19.2 STM1.1 STM1.13 STM1.19 STM1.32 STM1.48 STM1.64 U1.3 U2.3 VR1.2
+5V: 5V.1 C15.1 F3.1 F4.1 F5.2 R6.2 R10.2 VR1.3
CAN1_N: CAN1_N.1 D2.1 D3.1 H1.2 J11.2 J14.2 U1.6
CAN1_P: CAN1_P.1 D2.2 D3.2 J11.1 J14.1 R1.1 U1.7
CAN2_N: CAN2_N.1 D1.1 D4.1 H2.2 J10.2 J15.2 U2.6
CAN2_P: CAN2_A.1 D1.2 D4.2 J10.1 J15.1 R2.1 U2.7
GND: C1.1 C2.1 C3.1 C4.1 C5.1 C6.1 C7.1 C8.1 C9.1 C10.1 C11.1 C12.1 C13.1 C14.1 C15.2 C16.2 D1.3 D2.3 D3.3 D4.3 D5.2 D6.2 D7.2 GND1.1 GND2.1 GND3.1 J1.1 J2.3 J3.4 J4.2 J5.2 J6.3 J7.2 J8.2 J9.3 J10.3 J11.3 J12.3 J13.3 J14.3 J15.3 J16.2 P1.5 R12.2 R13.2 S1.1 S2.2 S3.2 STM1.12 STM1.18 STM1.31 STM1.47 STM1.63 U1.2 U1.8 U2.2 U2.8 VR1.1 Y1.2
NetC3_2: C3.2 STM1.6 Y1.1
NetC4_2: C4.2 STM1.5 Y1.3
NetC5_2: C5.2 P1.8 S1.4 STM1.7
NetC6_2: C6.2 STM1.30
NetD5_1: D5.1 F5.1 J16.1
NetD6_1: D6.1 R16.1
NetD7_1: D7.1 R17.2
NetD8_1: D8.1 STM1.9
NetD8_2: D8.2 STM1.10
NetD8_3: D8.3 STM1.11
NetF1_2: F1.2 J1.2
NetF2_2: F2.2 J2.2
NetF3_2: F3.2 J6.2
NetF4_2: F4.2 J9.2
NetH1_1: H1.1 R1.2
NetH2_1: H2.1 R2.2
NetI1_1: I1.1 J1.3 R14.1 STM1.40
NetI2_1: I2.1 J1.4 R15.1 STM1.41
NetJ2_1: J2.1 R3.1 STM1.14
NetJ3_2: J3.2 STM1.58
NetJ3_3: J3.3 STM1.59
NetJ4_1: J4.1 R4.1 STM1.56
NetJ5_1: J5.1 R5.1 STM1.55
NetJ7_1: J7.1 R8.1 STM1.54
NetJ8_1: J8.1 R9.1 STM1.53
NetJ12_1: J12.1 STM1.35
NetJ12_2: J12.2 R12.1 STM1.37
NetJ13_1: J13.1 STM1.36
NetJ13_2: J13.2 R13.1 STM1.38
NetP1_2: P1.2 STM1.51 UART_TX.1
NetP1_3: P1.3 STM1.52 UART_RX.1
NetP1_4: P1.4 STM1.50
NetP1_6: P1.6 STM1.46
NetP1_7: P1.7 STM1.49
NetQ1_2: Q1.2 R7.1 STM1.42
NetQ2_2: Q2.2 R11.1 STM1.43
NetR17_1: R17.1 STM1.8
NetR18_2: R18.2 S2.1 STM1.26
NetR19_1: R19.1 S3.1 STM1.27
NetSTM1_33: STM1.33 U2.4
NetSTM1_34: STM1.34 U2.1
NetSTM1_44: STM1.44 U1.4
NetSTM1_45: STM1.45 U1.1
SV1_PWM_5V: J6.1 Q1.3 R6.1
SV2_PWM_5V: J9.1 Q2.3 R10.1
pads on no net: H3.0 H4.0 H5.0 H6.0 J1.5 J1.6 J2.4 J2.5 J3.5 J3.6 J4.3 J4.4 J5.3 J5.4 J6.4 J6.5 J7.3 J7.4 J8.3 J8.4 J9.4 J9.5 J10.4 J10.5 J11.4 J11.5 J12.4 J12.5 J13.4 J13.5 J14.4 J14.5 J15.4 J15.5 J16.3 J16.4 S1.2 S1.3 STM1.2 STM1.3 STM1.4 STM1.15 STM1.16 STM1.17 STM1.20 STM1.21 STM1.22 STM1.23 STM1.24 STM1.25 STM1.28 STM1.29 STM1.39 STM1.57 STM1.60 STM1.61 STM1.62 U1.5 U2.5 Y1.4

## Silkscreen, mask and mechanical layers (free items; w line width, h text height)
Mechanical 1:
  circle w0.5: c2400.25,250.25 r59.06
  circle w0.5: c250.25,5750.25 r59.06
  circle w0.5: c250.25,250.25 r59.06
  circle w0.5: c3650.25,5750.25 r59.06
  lines w0.5: 0.25,250.25 ccw(c250.25,250.25) 250.25,0.25 2400.25,0.25 ccw(c2400.25,250.25) 2650.25,250.25 2650.25,4146.7 cw(c2900.25,4146.7) 2723.47,4323.47 3827.03,5427.03 ccw(c3650.25,5603.8) 3900.25,5603.8 3900.25,5750.25 ccw(c3650.25,5750.25) 3650.25,6000.25 250.25,6000.25 ccw(c250.25,5750.25) 0.25,5750.25 0.25,250.25

## Text inside footprints (layer, text, board x,y; h text height)
P1: Top Overlay "GND" at 8171.81,1625.04 h30 r90; Top Overlay "VCC" at 8167.87,1294.33 h30 r90; Top Overlay "RST" at 8471.81,1625.04 h30 r90; Top Overlay "CLK" at 8372.6,1621.1 h30 r90; Top Overlay "IO" at 8270.24,1625.04 h30 r90; Top Overlay "RTS" at 8478.9,1297.28 h30 r90; Top Overlay "RX" at 8372.6,1325.91 h30 r90; Top Overlay "TX" at 8270.24,1325.91 h30 r90